# Altium PCB board.PcbDoc
Units mm, origin at the board's own origin, x right, y up, seen from the top; angles counter-clockwise.
Board outline 72 x 77 mm, 2 copper layers (Top Layer, Bottom Layer), stack 0.97 mm thick; 96 components, 88 nets, 312 pads, 182 vias.
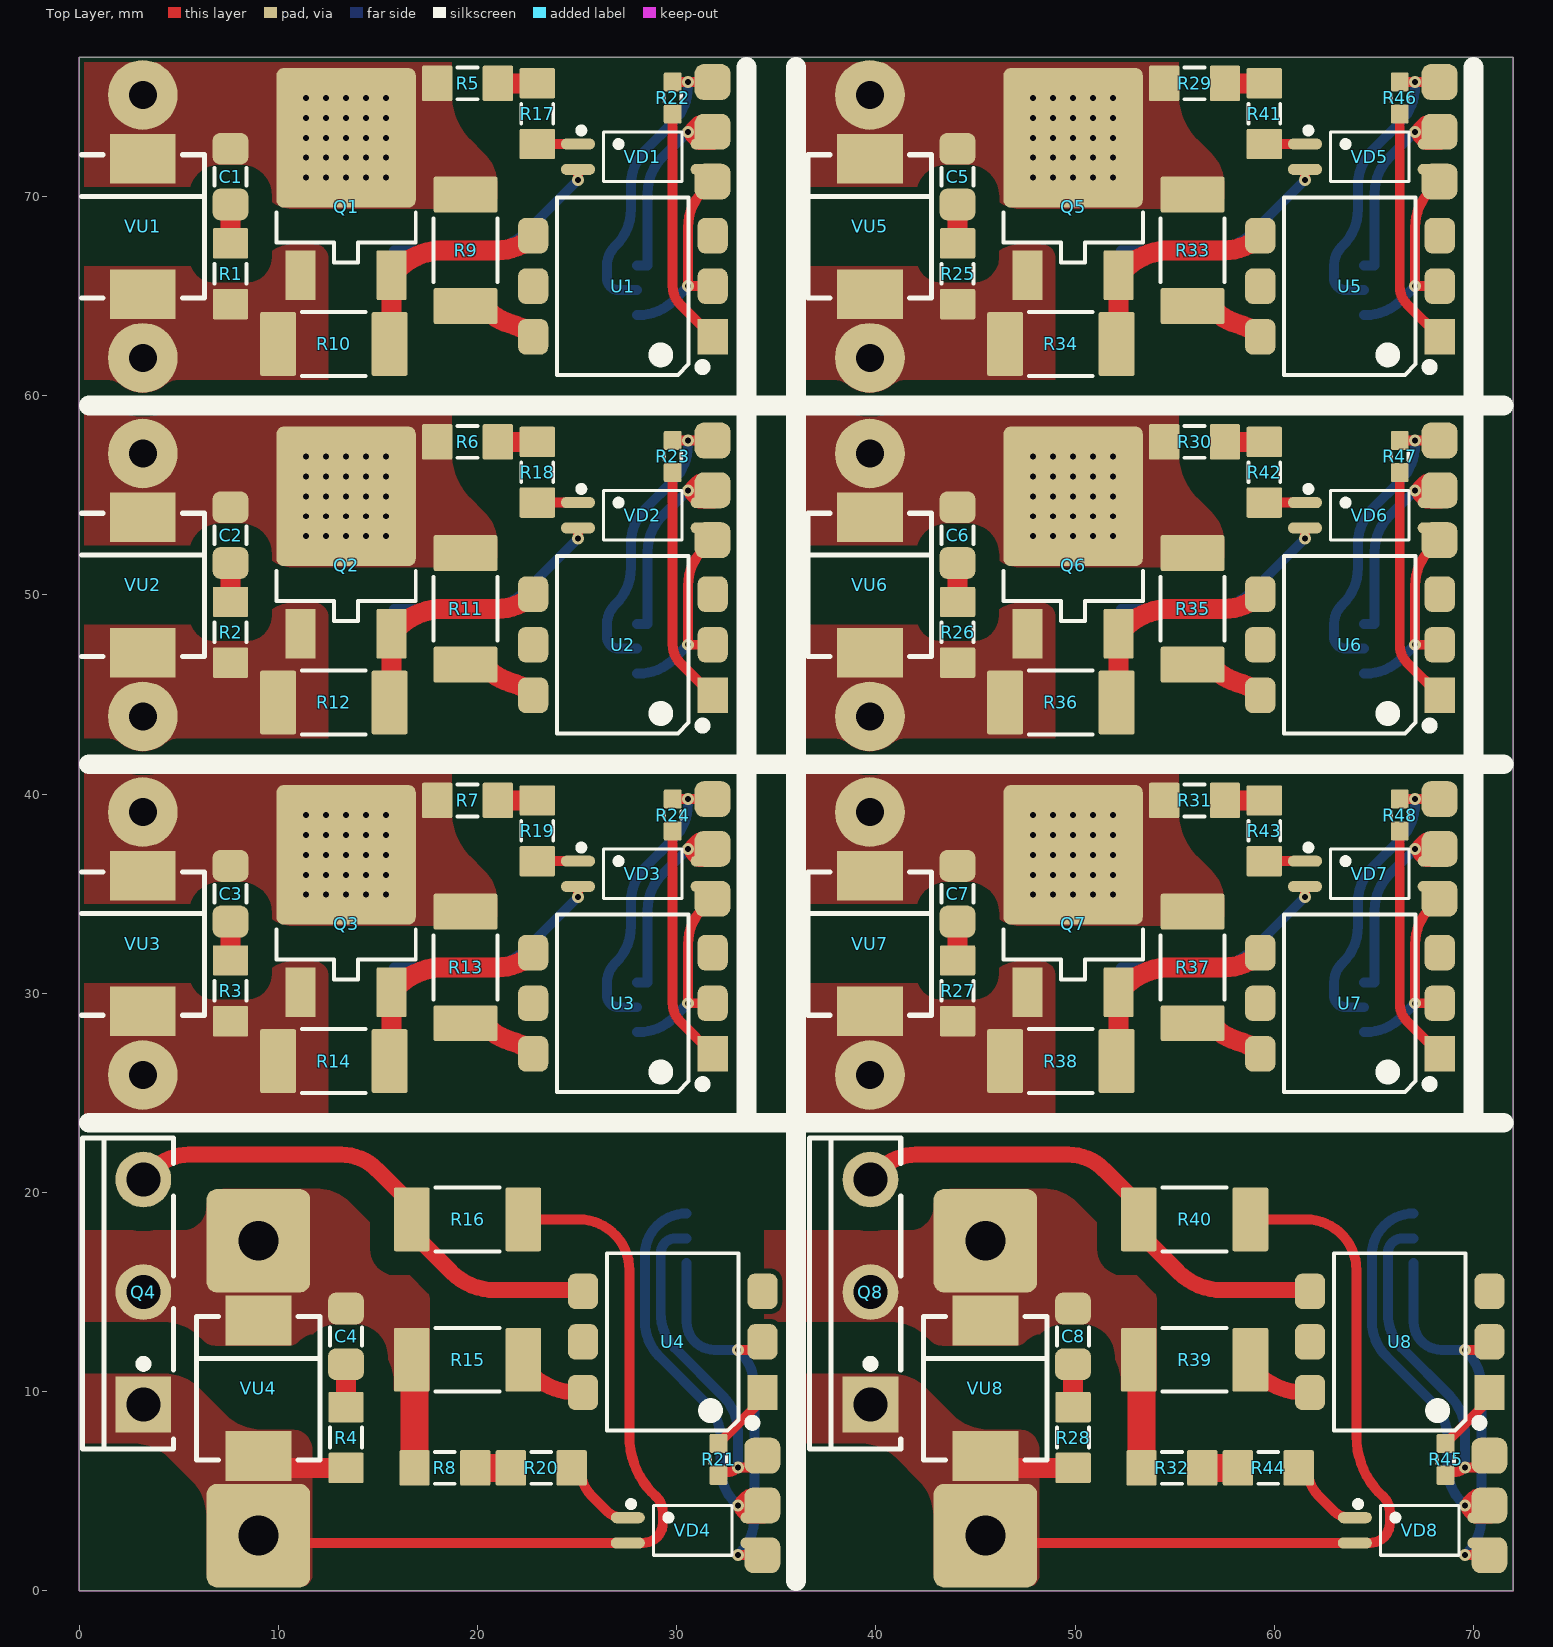
[diagram p0: Top Layer view]
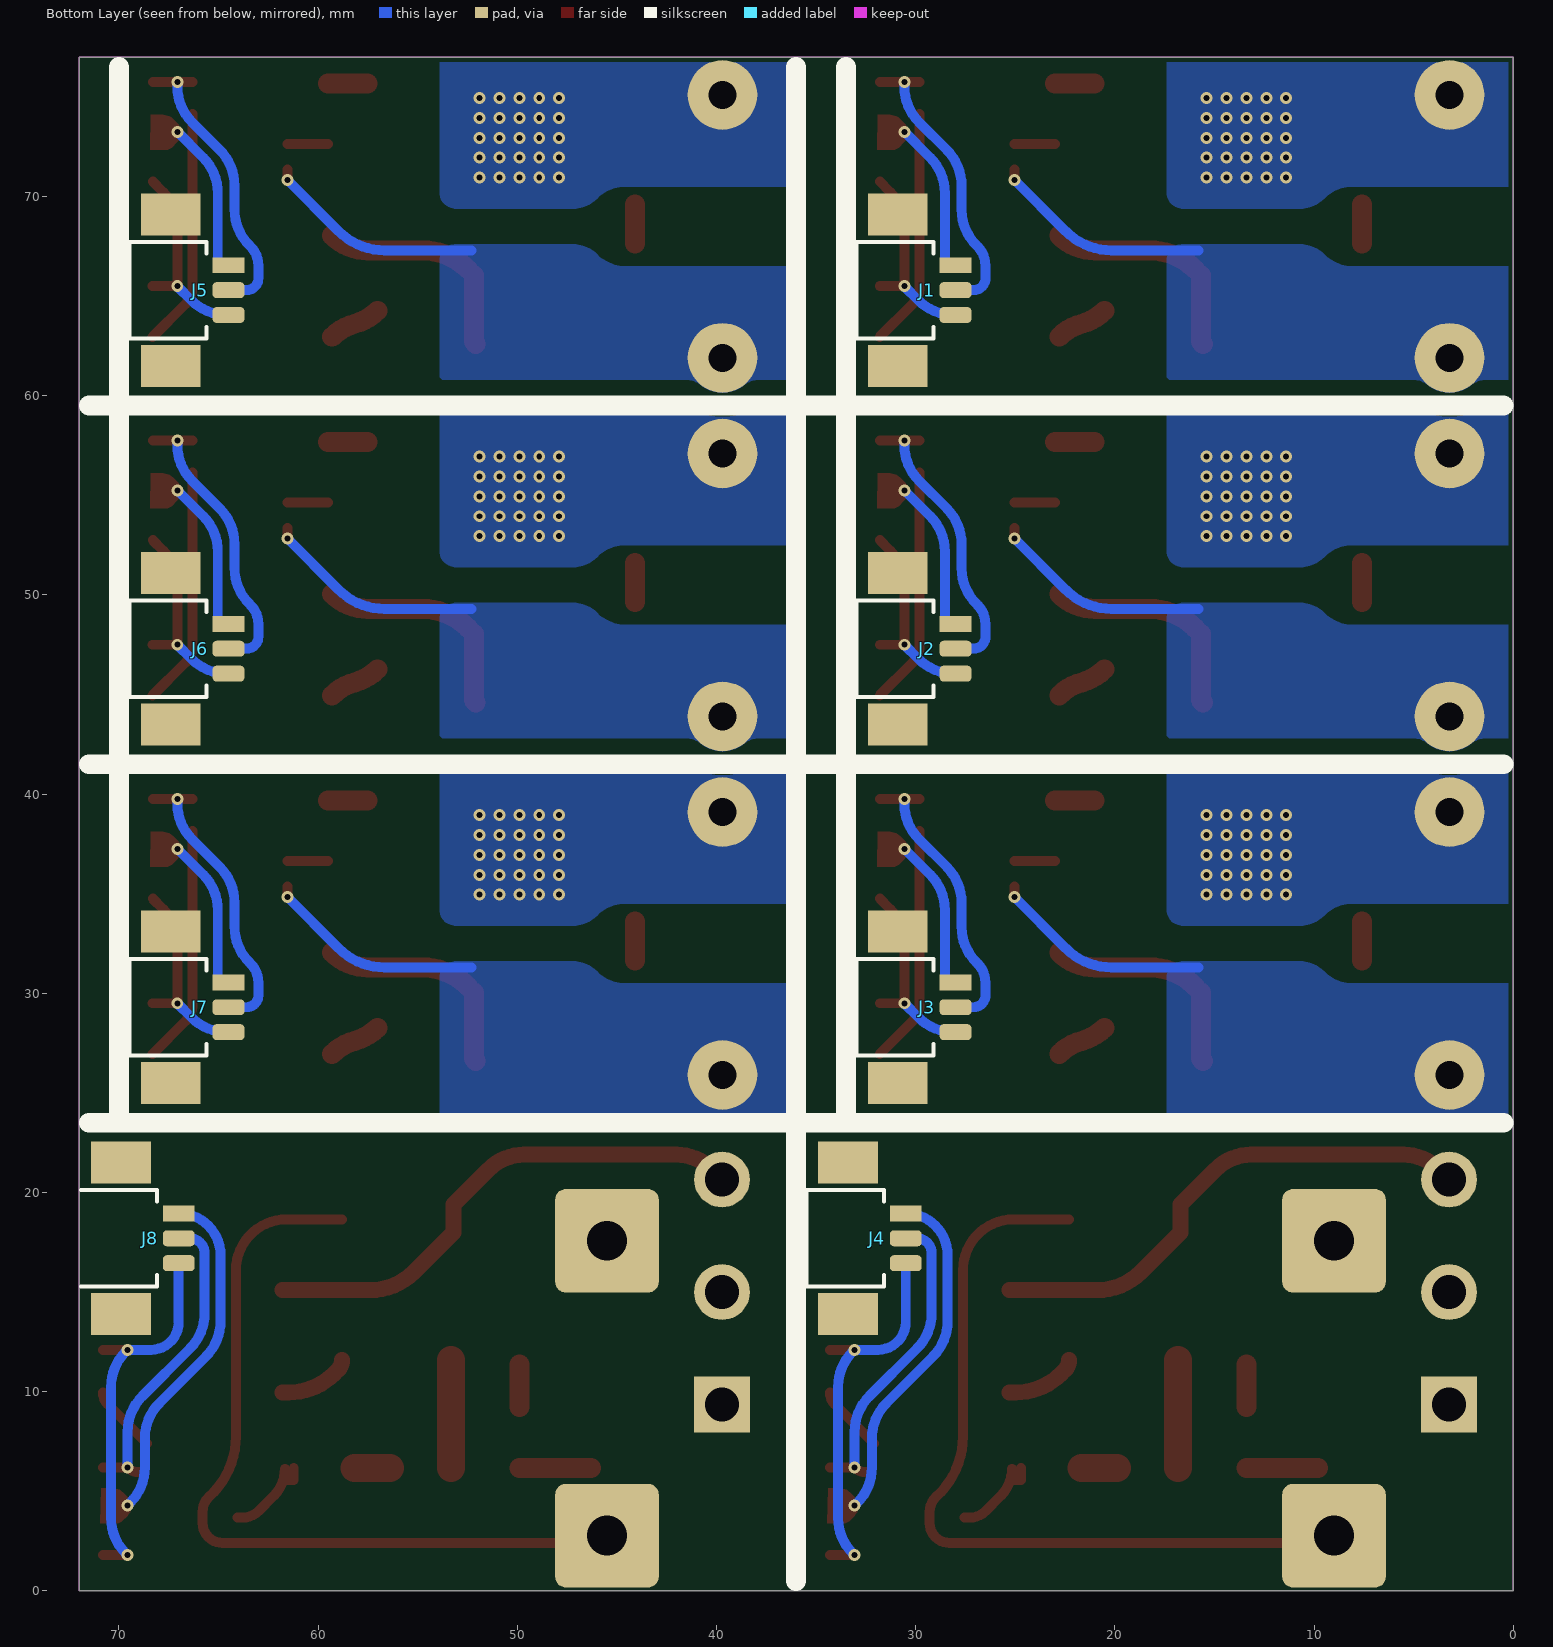
[diagram p1: Bottom Layer view, seen from below]
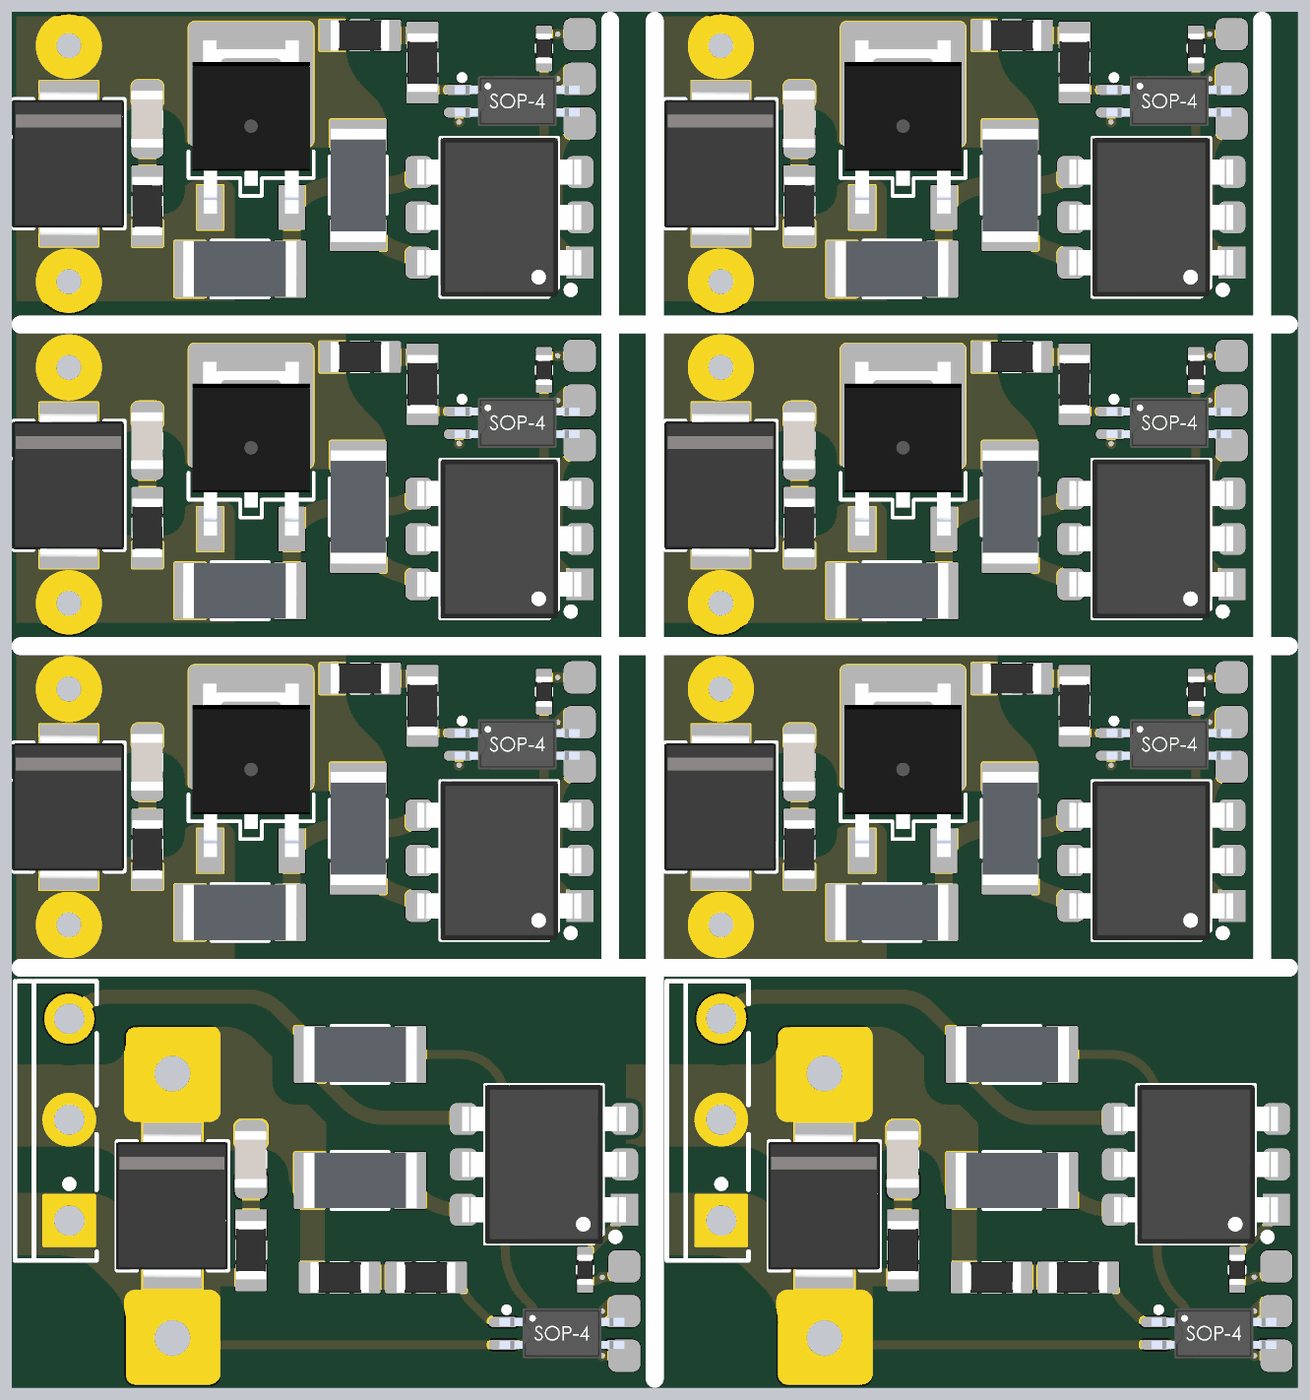
[diagram p2: 3D render of the assembled board from above, using the file's embedded part models]
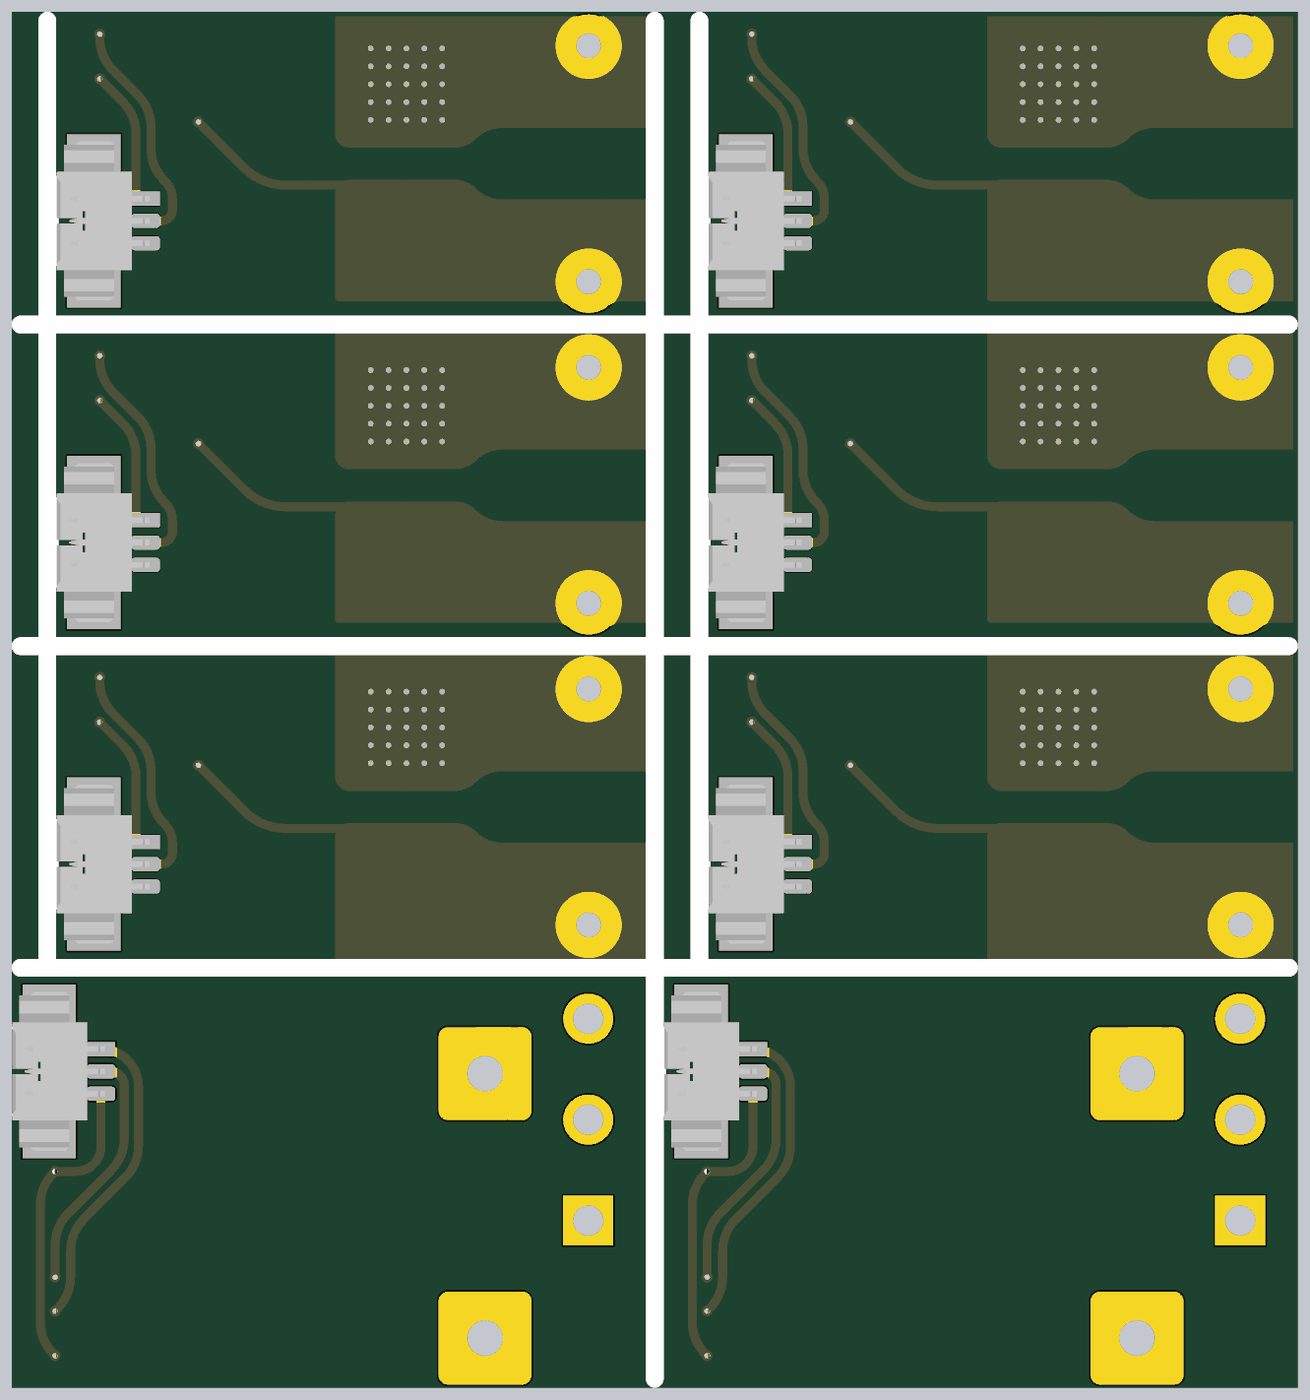
[diagram p3: 3D render of the assembled board from below, using the file's embedded part models]

## Layer stack, top to bottom
Top Solder: solder mask 0.0127, Solder Resist, Dk 3.8
Top Layer: signal copper 0.035
Dielectric: core 0.9, FR-4, Dk 4.5
Bottom Layer: signal copper 0.035
Bottom Solder: solder mask 0.0127, Solder Resist, Dk 3.8

## Board outline
0,0 0,77 72,77 72,0

## Design rules (kind name [scope] priority, off if disabled: settings)
AcuteAngle [All] p1: minimum=6.00000000000000E+0001 checktracksonly=FALSE
Clearance Clearance_1 [InNetClass('220') vs InNetClass('220')] p1: gap=1.2 ignorepadtopadclearanceinfootprint=FALSE
Clearance [All] p2: gap=0.25 ignorepadtopadclearanceinfootprint=FALSE except(0.13: Arc-Arc Arc-Track Arc-SMDPad Arc-Via Track-Track Track-SMDPad Track-Via SMDPad-SMDPad SMDPad-Via THPad-Via Via-Via; 0.15: Arc-THPad Arc-Text Arc-Hole Track-THPad Track-Text Track-Hole SMDPad-THPad SMDPad-Text SMDPad-Hole THPad-THPad THPad-Text THPad-Hole Via-Text Via-Hole Fill-Text Fill-Hole Poly-Text Poly-Hole Region-Text Region-Hole Text-Text Text-Hole)
ComponentClearance ComponentClearance_1 [HasFootprint('CONN_DG308-2.54-2P') vs HasFootprint('CONN_DG308-2.54-2P')] p1: gap=-1 collisioncheckmode=3 verticalgap=2540 showdistances=FALSE
ComponentClearance ComponentClearance_2 [HasFootprint('TP_TH_MICRO')] p2: gap=-1 collisioncheckmode=3 verticalgap=2540 showdistances=FALSE
ComponentClearance [All] p3: gap=0.3 collisioncheckmode=3 verticalgap=0.254 showdistances=FALSE
HoleSize [All] p1: absolutevalues=TRUE maxlimit=6 minlimit=0.2 maxpercent=80.000 minpercent=20.000
HoleToHoleClearance HoleToHoleClearance_1 [IsVia vs IsThruPin] p1: gap=0.7 allowstackedmicrovias=TRUE
HoleToHoleClearance [All] p2: gap=0.5 allowstackedmicrovias=TRUE
MinimumSolderMaskSliver [All] p1 off: minsoldermaskwidth=0.254
PlaneClearance [All] p1: clearance=0.45
PlaneConnect [All] p1: planeconnectstyle=Direct reliefexpansion=0.3 reliefentries=4 reliefconductorwidth=0.381 reliefairgap=0.178
PolygonConnect [All] p1: connectstyle=Direct reliefconductorwidth=0.381 reliefentries=4 polygonreliefangle="90 Angle" airgapwidth=0.356
RoutingVias [All] p1: holewidth=0.3 width=0.6 viastyle="Through Hole" minholewidth=0.2 minwidth=0.45 maxholewidth=0.9 maxwidth=1.27
SilkToSilkClearance [All] p1 off: silktosilkclearance=0.254
SilkToSolderMaskClearance [IsPad] p1 off: minsilkscreentomaskgap=0.254 clearancetoexposedcopper=TRUE
SolderMaskExpansion [All] p1: expansion=0.102 istentingtop=FALSE
UnRoutedNet [All] p1: checkbadconnections=TRUE
Width [All] p1: maxlimit=3.81 minlimit=0.14 preferedwidth=0.254
21 further rules are at their usual default settings.

## Classes and differential pairs
net class 220: NetC1_1 NetC1_2 NetC2_1 NetC2_2 NetC3_1 NetC3_2 NetC4_1 NetC4_2 NetC5_1 NetC5_2 NetC6_1 NetC6_2 NetC7_1 NetC7_2 NetC8_1 NetC8_2 NetQ1_1 NetQ1_3 NetQ2_1 NetQ2_3 NetQ3_1 NetQ3_3 NetQ4_1 NetQ4_3 NetQ5_1 NetQ5_3 NetQ6_1 NetQ6_3 NetQ7_1 NetQ7_3 NetQ8_1 NetQ8_3 NetR5_2 NetR6_2 NetR7_2 NetR8_2 NetR9_1 NetR11_1 NetR13_1 NetR15_1 NetR29_2 NetR30_2 NetR31_2 NetR32_2 NetR33_1 NetR35_1 NetR37_1 NetR39_1

## Components (designator, comment, footprint, x,y, rotation, side; value= is the part's Value field where it differs from the comment)
C1 "10nF" C1206#1 7.6,71 r90 top
C2 "10nF" C1206#1 7.6,53 r90 top
C3 "10nF" C1206#1 7.6,35 r90 top
C4 "10nF" C1206#2 13.4,12.775 r90 top
C5 "10nF" C1206#1 44.1,71 r90 top
C6 "10nF" C1206#1 44.1,53 r90 top
C7 "10nF" C1206#1 44.1,35 r90 top
C8 "10nF" C1206#2 49.9,12.775 r90 top
J1 "CTRL" CONN_MOLEX_532610371#1 30.9,65.3 r270 bottom
J2 "CTRL" CONN_MOLEX_532610371#1 30.9,47.3 r270 bottom
J3 "CTRL" CONN_MOLEX_532610371#1 30.9,29.3 r270 bottom
J4 "CTRL" CONN_MOLEX_532610371#2 33.4,17.7 r270 bottom
J5 "CTRL" CONN_MOLEX_532610371#1 67.4,65.3 r270 bottom
J6 "CTRL" CONN_MOLEX_532610371#1 67.4,47.3 r270 bottom
J7 "CTRL" CONN_MOLEX_532610371#1 67.4,29.3 r270 bottom
J8 "CTRL" CONN_MOLEX_532610371#2 69.9,17.7 r270 bottom
Q1 "T810-600B-TR" "TO-252AA (DPAK)" 13.4,69.5 r90 top
Q2 "T810-600B-TR" "TO-252AA (DPAK)" 13.4,51.5 r90 top
Q3 "T810-600B-TR" "TO-252AA (DPAK)" 13.4,33.5 r90 top
Q4 "BTA41" TO-3P_L15.5-W4.6-P5.65-T 3.225,15 r180 top
Q5 "T810-600B-TR" "TO-252AA (DPAK)" 49.9,69.5 r90 top
Q6 "T810-600B-TR" "TO-252AA (DPAK)" 49.9,51.5 r90 top
Q7 "T810-600B-TR" "TO-252AA (DPAK)" 49.9,33.5 r90 top
Q8 "BTA41" TO-3P_L15.5-W4.6-P5.65-T 39.725,15 r180 top
R1 "39" R1206 7.6,66.124 r90 top
R2 "39" R1206 7.6,48.124 r90 top
R3 "39" R1206 7.6,30.124 r90 top
R4 "39" R1206 13.4,7.699 r90 top
R5 "220k" R1206 19.5,75.683 r0 top
R6 "220k" R1206 19.5,57.683 r0 top
R7 "220k" R1206 19.5,39.683 r0 top
R8 "220k" R1206 18.362,6.175 r0 top
R9 "360" R2512 19.4,67.3 r90 top
R10 "360" R2512 12.788,62.6 r0 top
R11 "360" R2512 19.4,49.3 r90 top
R12 "360" R2512 12.788,44.6 r0 top
R13 "360" R2512 19.4,31.3 r90 top
R14 "360" R2512 12.788,26.6 r0 top
R15 "360" R2512 19.5,11.6 r180 top
R16 "360" R2512 19.5,18.65 r180 top
R17 "220k" R1206 23,74.159 r270 top
R18 "220k" R1206 23,56.159 r270 top
R19 "220k" R1206 23,38.159 r270 top
R20 "220k" R1206 23.2,6.175 r0 top
R21 "470" R0603 32.1,6.6 r270 top
R22 "470" R0603 29.8,74.95 r90 top
R23 "470" R0603 29.8,56.95 r90 top
R24 "470" R0603 29.8,38.95 r90 top
R25 "39" R1206 44.1,66.124 r90 top
R26 "39" R1206 44.1,48.124 r90 top
R27 "39" R1206 44.1,30.124 r90 top
R28 "39" R1206 49.9,7.699 r90 top
R29 "220k" R1206 56,75.683 r0 top
R30 "220k" R1206 56,57.683 r0 top
R31 "220k" R1206 56,39.683 r0 top
R32 "220k" R1206 54.862,6.175 r0 top
R33 "360" R2512 55.9,67.3 r90 top
R34 "360" R2512 49.288,62.6 r0 top
R35 "360" R2512 55.9,49.3 r90 top
R36 "360" R2512 49.288,44.6 r0 top
R37 "360" R2512 55.9,31.3 r90 top
R38 "360" R2512 49.288,26.6 r0 top
R39 "360" R2512 56,11.6 r180 top
R40 "360" R2512 56,18.65 r180 top
R41 "220k" R1206 59.5,74.159 r270 top
R42 "220k" R1206 59.5,56.159 r270 top
R43 "220k" R1206 59.5,38.159 r270 top
R44 "220k" R1206 59.7,6.175 r0 top
R45 "470" R0603 68.6,6.6 r270 top
R46 "470" R0603 66.3,74.95 r90 top
R47 "470" R0603 66.3,56.95 r90 top
R48 "470" R0603 66.3,38.95 r90 top
U1 "MOC3063SM" SMD-6#1 27.3,65.5 r90 top
U2 "MOC3063SM" SMD-6#1 27.3,47.5 r90 top
U3 "MOC3063SM" SMD-6#1 27.3,29.5 r90 top
U4 "MOC3063SM" SMD-6#2 29.8,12.5 r90 top
U5 "MOC3063SM" SMD-6#1 63.8,65.5 r90 top
U6 "MOC3063SM" SMD-6#1 63.8,47.5 r90 top
U7 "MOC3063SM" SMD-6#1 63.8,29.5 r90 top
U8 "MOC3063SM" SMD-6#2 66.3,12.5 r90 top
VD1 "EL3H4(A)(TA)-VG" SOP-4_L4.4-W2.8-P1.27-LS7.0-TL#1 28.3,72 r0 top
VD2 "EL3H4(A)(TA)-VG" SOP-4_L4.4-W2.8-P1.27-LS7.0-TL#1 28.3,54 r0 top
VD3 "EL3H4(A)(TA)-VG" SOP-4_L4.4-W2.8-P1.27-LS7.0-TL#1 28.3,36 r0 top
VD4 "EL3H4(A)(TA)-VG" SOP-4_L4.4-W2.8-P1.27-LS7.0-TL#2 30.8,3.04 r0 top
VD5 "EL3H4(A)(TA)-VG" SOP-4_L4.4-W2.8-P1.27-LS7.0-TL#1 64.8,72 r0 top
VD6 "EL3H4(A)(TA)-VG" SOP-4_L4.4-W2.8-P1.27-LS7.0-TL#1 64.8,54 r0 top
VD7 "EL3H4(A)(TA)-VG" SOP-4_L4.4-W2.8-P1.27-LS7.0-TL#1 64.8,36 r0 top
VD8 "EL3H4(A)(TA)-VG" SOP-4_L4.4-W2.8-P1.27-LS7.0-TL#2 67.3,3.04 r0 top
VU1 "220V" SMC#1 3.2,68.5 r270 top
VU2 "220V" SMC#1 3.2,50.5 r270 top
VU3 "220V" SMC#1 3.2,32.5 r270 top
VU4 "220V" SMC#2 9,10.175 r270 top
VU5 "220V" SMC#1 39.7,68.5 r270 top
VU6 "220V" SMC#1 39.7,50.5 r270 top
VU7 "220V" SMC#1 39.7,32.5 r270 top
VU8 "220V" SMC#2 45.5,10.175 r270 top

## Footprints (in the part's own frame and the unit in brackets; to place one, negate y for a bottom-side part, rotate by r counter-clockwise, add the part's x,y. Pads: shape width x height; smd on the part's side, far side on the other; paste and mask are expansions set on the pad)
C1206#1 [mm] "Chip Capacitor"
  rrect50% 1.6x1.8 smd mask+0.05: 1(-1.4,0) 2(1.4,0)
  silkscreen extent -0.45,-0.8 0.45,0.8, body extent -1.6,-0.88 1.6,0.92, height 1.6
C1206#2 [mm] "Chip Capacitor"
  rrect50% 1.6x1.8 smd: 1(-1.4,0) 2(1.4,0)
  silkscreen extent -0.45,-0.8 0.45,0.8, body extent -1.6,-0.88 1.6,0.92, height 1.6
CONN_MOLEX_532610371#1 [mm] "R/A"
  rect 0.8x1.6 smd mask+0.05: 1(-1.25,2.9)
  rrect50% 0.8x1.6 smd mask+0.05: 2(0,2.9) 3(1.25,2.9)
  rect 2.1x3 smd: 4(-3.8,0) 4(3.8,0)
  silkscreen extent -2.43,-2.08 2.42,1.8, body extent -4.45,-2.07 4.45,3.13, height 3.4
CONN_MOLEX_532610371#2 [mm] "R/A"
  rect 0.8x1.6 smd: 1(-1.25,2.9)
  rrect50% 0.8x1.6 smd: 2(0,2.9) 3(1.25,2.9)
  rect 2.1x3 smd: 4(-3.8,0) 4(3.8,0)
  silkscreen extent -2.43,-2.08 2.42,1.8, body extent -4.45,-2.07 4.45,3.13, height 3.4
R0603 [mil] "Chip Resistor; Body 1.6 x 0.8 mm (LxW typ)"
  rrect20% 38x35.43 smd mask+1.97: 1(-31.5,0) 2(31.5,0)
  silkscreen extent -7,-17 7,17, body extent -33,-18 33,18, height 22
R1206 [mil] "Chip Resistor"
  rrect10% 60x70 smd mask+1.97: 1(-60,0) 2(60,0)
  silkscreen extent -20,-31 20,31, body extent -65,-33 65,33, height 26
R2512 [mm] "Chip Resistor; Body 6.4 x 3.2 mm (LxW typ)"
  rrect10% 1.8x3.2 smd mask+0.05: 1(-2.8,0) 2(2.8,0)
  silkscreen extent -1.6,-1.6 1.6,1.6, body extent -3.19,-1.55 3.16,1.55, height 0.55
SMC#1 [mm]
  rect 2.5x3.3 smd mask+0.05: 1(3.4,0) 2(-3.4,0)
  silkscreen extent -3.6,-3.07 3.6,3.1, body extent -4.08,-3.15 4.08,3.1, height 2.65
SMC#2 [mm]
  rect 2.5x3.3 smd: 1(3.4,0) 2(-3.4,0)
  silkscreen extent -3.6,-3.1 3.6,3.1, body extent -4.08,-3.15 4.08,3.1, height 2.65
SMD-6#1 [mm]
  rect 1.78x1.52 smd mask+0.025: 1(-2.54,-4.505)
  rrect50% 1.78x1.52 smd mask+0.025: 2(0,-4.505) 3(2.54,-4.505)
  rrect50% 1.78x1.52 smd mask+0.05: 4(2.54,4.505) 5(0,4.505) 6(-2.54,4.505)
  silkscreen extent -4.45,-4.1 4.45,3.3, body extent -4.45,-4.58 4.45,4.58, height 5.08
SMD-6#2 [mm]
  rect 1.78x1.52 smd mask+0.025: 1(-2.54,-4.505)
  rrect50% 1.78x1.52 smd mask+0.025: 2(0,-4.505) 3(2.54,-4.505) 4(2.54,4.505) 5(0,4.505) 6(-2.54,4.505)
  silkscreen extent -4.45,-4.1 4.45,3.3, body extent -4.45,-4.58 4.45,4.58, height 5.08
SOP-4_L4.4-W2.8-P1.27-LS7.0-TL#1 [mm]
  oval 1.71x0.56 smd mask+0.05: 1(-3.255,0.635) 2(-3.255,-0.635) 3(3.255,-0.635) 4(3.255,0.635)
  silkscreen extent -3.24,-1.25 1.97,1.47, body extent -3.5,-1.4 3.5,1.4, height 2.1
SOP-4_L4.4-W2.8-P1.27-LS7.0-TL#2 [mm]
  oval 1.71x0.56 smd: 1(-3.255,0.635) 2(-3.255,-0.635) 3(3.255,-0.635) 4(3.255,0.635)
  silkscreen extent -3.24,-1.25 1.97,1.47, body extent -3.5,-1.4 3.5,1.4, height 2.1
TO-3P_L15.5-W4.6-P5.65-T [mm]
  rect 2.8x2.8 hole 1.7: 1(0,5.65)
  round 2.8 hole 1.7: 2(0,0) 3(0,-5.65)
  silkscreen extent -1.52,-7.75 3.05,7.87
"TO-252AA (DPAK)" [mm] "D-PAK"
  rect 2.5x1.5 smd mask+0.05: 1(-3.45,2.286)
  rrect10% 7x7 smd mask+0.05: 2(3.45,0)
  rrect10% 2.5x1.5 smd mask+0.05: 3(-3.45,-2.286)
  silkscreen extent -2.8,-3.5 -0.3,3.5, body extent -3.8,-3.29 5.9,3.29, height 2.3

## Part data
C1 C2 C3 C4 C5 C6 C7 C8: library part CAP, "10nF 1kV 1206"
J1 J2 J3 J4 J5 J6 J7 J8: library part "Header 3", "532610371"
Q1 Q2 Q3 Q5 Q6 Q7: library part BTA16F
R1 R2 R3 R4 R25 R26 R27 R28: library part RES, "39R 1206"
R5 R6 R7 R8 R17 R18 R19 R20 R29 R30 R31 R32 R41 R42 R43 R44: library part RES, "220k 1206"
R9 R10 R11 R12 R13 R14 R15 R16 R33 R34 R35 R36 R37 R38 R39 R40: library part RES, "360R 2512"
R21 R22 R23 R24 R45 R46 R47 R48: library part RES, "470R 0603"
U1 U2 U3 U4 U5 U6 U7 U8: "MOC3063S-TA1"
VU1 VU2 VU3 VU4 VU5 VU6 VU7 VU8: library part RES, "3225D471KJ"

## Free pads (board coordinates)
  round 3.5 hole 1.4: 1(3.2,25.9) 1(3.2,43.9) 1(3.2,61.9) 1(39.7,25.9) 1(39.7,43.9) 1(39.7,61.9) 2(3.2,39.1) 2(3.2,57.1) 2(3.2,75.1) 2(39.7,39.1) 2(39.7,57.1) 2(39.7,75.1)
  rrect20% 5.2x5.2 hole 2: 1(9,2.775) 1(45.5,2.775) 2(9,17.575) 2(45.5,17.575)
  rrect50% 1.8x1.8 smd mask+0.05: *(31.8,34.75) *(31.8,52.75) *(31.8,70.75) *(34.3,4.29) *(68.3,34.75) *(68.3,52.75) *(68.3,70.75) *(70.8,4.29) *1(31.8,37.25) *1(31.8,55.25) *1(31.8,73.25) *1(34.3,1.79) *1(68.3,37.25) *1(68.3,55.25) *1(68.3,73.25) *1(70.8,1.79) *2(31.8,39.75) *2(31.8,57.75) *2(31.8,75.75) *2(34.3,6.79) *2(68.3,39.75) *2(68.3,57.75) *2(68.3,75.75) *2(70.8,6.79)

## Via types
v1: diameter 0.6, hole 0.3, Top Layer to Bottom Layer, tented both sides, 182 vias

## Nets (pads, with @x,y where several pads share a name; then routed paths per layer and width w, separated by ;. In a path a pad name is that pad's centre, name@x,y a point inside that pad or via, vN(x,y) a via of type N, cw(c..) or ccw(c..) an arc to the next point about the centre after c; other vN are vias at no path point)
NetC1_1: C1.1 R1.2 | length 2
  Top Layer w1: R1.2 C1.1
NetC1_2: C1.2 pad.2@3.2,75.1 Q1.2 R5.1 R9.2 VU1.2
  other v1: 11.4,70.95 12.4,70.95 13.4,70.95 14.4,70.95 15.4,70.95 11.4,71.95 12.4,71.95 13.4,71.95 14.4,71.95 15.4,71.95 11.4,72.95 12.4,72.95 13.4,72.95 14.4,72.95 15.4,72.95 11.4,73.95 12.4,73.95 13.4,73.95 14.4,73.95 15.4,73.95 11.4,74.95 12.4,74.95 13.4,74.95 14.4,74.95 15.4,74.95
NetC2_1: C2.1 R2.2 | length 2
  Top Layer w1: R2.2 C2.1
NetC2_2: C2.2 pad.2@3.2,57.1 Q2.2 R6.1 R11.2 VU2.2
  other v1: 11.4,52.95 12.4,52.95 13.4,52.95 14.4,52.95 15.4,52.95 11.4,53.95 12.4,53.95 13.4,53.95 14.4,53.95 15.4,53.95 11.4,54.95 12.4,54.95 13.4,54.95 14.4,54.95 15.4,54.95 11.4,55.95 12.4,55.95 13.4,55.95 14.4,55.95 15.4,55.95 11.4,56.95 12.4,56.95 13.4,56.95 14.4,56.95 15.4,56.95
NetC3_1: C3.1 R3.2 | length 2
  Top Layer w1: R3.2 C3.1
NetC3_2: C3.2 pad.2@3.2,39.1 Q3.2 R7.1 R13.2 VU3.2
  other v1: 11.4,34.95 12.4,34.95 13.4,34.95 14.4,34.95 15.4,34.95 11.4,35.95 12.4,35.95 13.4,35.95 14.4,35.95 15.4,35.95 11.4,36.95 12.4,36.95 13.4,36.95 14.4,36.95 15.4,36.95 11.4,37.95 12.4,37.95 13.4,37.95 14.4,37.95 15.4,37.95 11.4,38.95 12.4,38.95 13.4,38.95 14.4,38.95 15.4,38.95
NetC4_1: C4.1 R4.2 | length 2.2
  Top Layer w1: R4.2 C4.1
NetC4_2: C4.2 pad.2@9,17.575 Q4.2 R8.1 R15.2 VU4.2 | length 5.4
  Top Layer w1.4: R8.1 R15.2@16.838,11.6
NetC5_1: C5.1 R25.2 | length 2
  Top Layer w1: R25.2 C5.1
NetC5_2: C5.2 pad.2@39.7,75.1 Q5.2 R29.1 R33.2 VU5.2
  other v1: 47.9,70.95 48.9,70.95 49.9,70.95 50.9,70.95 51.9,70.95 47.9,71.95 48.9,71.95 49.9,71.95 50.9,71.95 51.9,71.95 47.9,72.95 48.9,72.95 49.9,72.95 50.9,72.95 51.9,72.95 47.9,73.95 48.9,73.95 49.9,73.95 50.9,73.95 51.9,73.95 47.9,74.95 48.9,74.95 49.9,74.95 50.9,74.95 51.9,74.95
NetC6_1: C6.1 R26.2 | length 2
  Top Layer w1: R26.2 C6.1
NetC6_2: C6.2 pad.2@39.7,57.1 Q6.2 R30.1 R35.2 VU6.2
  other v1: 47.9,52.95 48.9,52.95 49.9,52.95 50.9,52.95 51.9,52.95 47.9,53.95 48.9,53.95 49.9,53.95 50.9,53.95 51.9,53.95 47.9,54.95 48.9,54.95 49.9,54.95 50.9,54.95 51.9,54.95 47.9,55.95 48.9,55.95 49.9,55.95 50.9,55.95 51.9,55.95 47.9,56.95 48.9,56.95 49.9,56.95 50.9,56.95 51.9,56.95
NetC7_1: C7.1 R27.2 | length 2
  Top Layer w1: R27.2 C7.1
NetC7_2: C7.2 pad.2@39.7,39.1 Q7.2 R31.1 R37.2 VU7.2
  other v1: 47.9,34.95 48.9,34.95 49.9,34.95 50.9,34.95 51.9,34.95 47.9,35.95 48.9,35.95 49.9,35.95 50.9,35.95 51.9,35.95 47.9,36.95 48.9,36.95 49.9,36.95 50.9,36.95 51.9,36.95 47.9,37.95 48.9,37.95 49.9,37.95 50.9,37.95 51.9,37.95 47.9,38.95 48.9,38.95 49.9,38.95 50.9,38.95 51.9,38.95
NetC8_1: C8.1 R28.2 | length 2.2
  Top Layer w1: R28.2 C8.1
NetC8_2: C8.2 pad.2@45.5,17.575 Q8.2 R32.1 R39.2 VU8.2 | length 5.4
  Top Layer w1.4: R32.1 R39.2@53.338,11.6
NetJ1_1: J1.1 pad.*1@31.8,73.25 VD1.4 | length 8
  Bottom Layer w0.5: J1.1 28.54,66.55 28.54,70.181 cw(c31.054,70.181) 29.276,71.959 v1(30.568,73.25)
NetJ1_2: J1.2 pad.*2@31.8,75.75 R22.2 | length 15
  Top Layer w0.5: R22.2 v1(30.568,75.75) pad.*2@31.8,75.75
  Bottom Layer w0.5: J1.2 27.1,65.3 cw(c27.1,65.9) 26.5,65.9 26.5,66.534 cw(c27.866,66.534) 26.9,67.5 26.963,67.563 ccw(c25.185,69.342) 27.7,69.342 27.7,70.558 cw(c30.215,70.558) 28.437,72.337 29.831,73.731 ccw(c28.053,75.509) 30.568,75.509 v1(30.568,75.75)
NetJ1_3: J1.3 pad.*@31.8,70.75 U1.2 VD1.3 | length 9.9
  Top Layer w0.5: pad.*@31.8,70.75 31.309,70.259 ccw(c33.087,68.481) 30.573,68.481 v1(30.573,65.5) U1.2
  Bottom Layer w0.5: J1.3 28.081,64.05 ccw(c28.081,66.565) 29.859,64.787 v1(30.573,65.5)
NetJ2_1: J2.1 pad.*1@31.8,55.25 VD2.4 | length 8
  Bottom Layer w0.5: J2.1 28.54,48.55 28.54,52.181 cw(c31.054,52.181) 29.276,53.959 v1(30.568,55.25)
NetJ2_2: J2.2 pad.*2@31.8,57.75 R23.2 | length 15
  Top Layer w0.5: R23.2 v1(30.568,57.75) pad.*2@31.8,57.75
  Bottom Layer w0.5: J2.2 27.1,47.3 cw(c27.1,47.9) 26.5,47.9 26.5,48.534 cw(c27.866,48.534) 26.9,49.5 26.963,49.563 ccw(c25.185,51.342) 27.7,51.342 27.7,52.558 cw(c30.215,52.558) 28.437,54.337 29.831,55.731 ccw(c28.053,57.509) 30.568,57.509 v1(30.568,57.75)
NetJ2_3: J2.3 pad.*@31.8,52.75 U2.2 VD2.3 | length 9.9
  Top Layer w0.5: pad.*@31.8,52.75 31.309,52.259 ccw(c33.087,50.481) 30.573,50.481 v1(30.573,47.5) U2.2
  Bottom Layer w0.5: J2.3 28.081,46.05 ccw(c28.081,48.565) 29.859,46.787 v1(30.573,47.5)
NetJ3_1: J3.1 pad.*1@31.8,37.25 VD3.4 | length 8
  Bottom Layer w0.5: J3.1 28.54,30.55 28.54,34.181 cw(c31.054,34.181) 29.276,35.959 v1(30.568,37.25)
NetJ3_2: J3.2 pad.*2@31.8,39.75 R24.2 | length 15
  Top Layer w0.5: R24.2 v1(30.568,39.75) pad.*2@31.8,39.75
  Bottom Layer w0.5: J3.2 27.1,29.3 cw(c27.1,29.9) 26.5,29.9 26.5,30.534 cw(c27.866,30.534) 26.9,31.5 26.963,31.563 ccw(c25.185,33.342) 27.7,33.342 27.7,34.558 cw(c30.215,34.558) 28.437,36.337 29.831,37.731 ccw(c28.053,39.509) 30.568,39.509 v1(30.568,39.75)
NetJ3_3: J3.3 pad.*@31.8,34.75 U3.2 VD3.3 | length 9.9
  Top Layer w0.5: pad.*@31.8,34.75 31.309,34.259 ccw(c33.087,32.481) 30.573,32.481 v1(30.573,29.5) U3.2
  Bottom Layer w0.5: J3.3 28.081,28.05 ccw(c28.081,30.565) 29.859,28.787 v1(30.573,29.5)
NetJ4_1: J4.1 pad.*@34.3,4.29 VD4.4 | length 17.5
  Bottom Layer w0.5: J4.1 ccw(c30.5,16.85) 28.4,16.85 28.4,13.542 ccw(c30.915,13.542) 29.137,11.763 31.463,9.437 cw(c29.685,7.658) 32.2,7.658 32.2,6.199 ccw(c34.715,6.199) 32.937,4.421 v1(33.068,4.29)
NetJ4_2: J4.2 pad.*2@34.3,6.79 R21.2 | length 15.7
  Top Layer w0.5: R21.2@32.515,5.961 ccw(c32.515,6.742) v1(33.068,6.19) pad.*2@34.3,6.19
  Bottom Layer w0.5: J4.2 29.95,17.7 ccw(c29.95,16.95) 29.2,16.95 29.2,13.942 ccw(c31.715,13.942) 29.937,12.163 32.331,9.769 cw(c30.553,7.991) 33.068,7.991 v1(33.068,6.19)
NetJ4_3: J4.3 pad.*1@34.3,1.79 U4.2 VD4.3 | length 19.6
  Top Layer w0.5: v1(33.068,1.79) pad.*1@34.3,1.79 ; v1(33.073,12.1) U4.2@34.305,12.1
  Bottom Layer w0.5: J4.3 30.5,13.5 ccw(c31.9,13.5) 31.9,12.1 v1(33.073,12.1) 33.163,12.009 cw(c31.385,10.231) 33.9,10.231 33.9,3.664 cw(c31.385,3.664) 33.163,1.886 v1(33.068,1.79)
NetJ5_1: J5.1 pad.*1@68.3,73.25 VD5.4 | length 8
  Bottom Layer w0.5: J5.1 65.04,66.55 65.04,70.181 cw(c67.554,70.181) 65.776,71.959 v1(67.068,73.25)
NetJ5_2: J5.2 pad.*2@68.3,75.75 R46.2 | length 15
  Top Layer w0.5: R46.2 v1(67.068,75.75) pad.*2@68.3,75.75
  Bottom Layer w0.5: J5.2 63.6,65.3 cw(c63.6,65.9) 63,65.9 63,66.534 cw(c64.366,66.534) 63.4,67.5 63.464,67.563 ccw(c61.685,69.342) 64.2,69.342 64.2,70.558 cw(c66.715,70.558) 64.937,72.337 66.331,73.731 ccw(c64.553,75.509) 67.068,75.509 v1(67.068,75.75)
NetJ5_3: J5.3 pad.*@68.3,70.75 U5.2 VD5.3 | length 9.9
  Top Layer w0.5: pad.*@68.3,70.75 67.809,70.259 ccw(c69.587,68.481) 67.073,68.481 v1(67.073,65.5) U5.2
  Bottom Layer w0.5: J5.3 64.581,64.05 ccw(c64.581,66.565) 66.359,64.787 v1(67.073,65.5)
NetJ6_1: J6.1 pad.*1@68.3,55.25 VD6.4 | length 8
  Bottom Layer w0.5: J6.1 65.04,48.55 65.04,52.181 cw(c67.554,52.181) 65.776,53.959 v1(67.068,55.25)
NetJ6_2: J6.2 pad.*2@68.3,57.75 R47.2 | length 15
  Top Layer w0.5: R47.2 v1(67.068,57.75) pad.*2@68.3,57.75
  Bottom Layer w0.5: J6.2 63.6,47.3 cw(c63.6,47.9) 63,47.9 63,48.534 cw(c64.366,48.534) 63.4,49.5 63.463,49.563 ccw(c61.685,51.342) 64.2,51.342 64.2,52.558 cw(c66.715,52.558) 64.937,54.337 66.331,55.731 ccw(c64.553,57.509) 67.068,57.509 v1(67.068,57.75)
NetJ6_3: J6.3 pad.*@68.3,52.75 U6.2 VD6.3 | length 9.9
  Top Layer w0.5: pad.*@68.3,52.75 67.809,52.259 ccw(c69.587,50.481) 67.073,50.481 v1(67.073,47.5) U6.2
  Bottom Layer w0.5: J6.3 64.581,46.05 ccw(c64.581,48.565) 66.359,46.787 v1(67.073,47.5)
NetJ7_1: J7.1 pad.*1@68.3,37.25 VD7.4 | length 8
  Bottom Layer w0.5: J7.1 65.04,30.55 65.04,34.181 cw(c67.554,34.181) 65.776,35.959 v1(67.068,37.25)
NetJ7_2: J7.2 pad.*2@68.3,39.75 R48.2 | length 15
  Top Layer w0.5: R48.2 v1(67.068,39.75) pad.*2@68.3,39.75
  Bottom Layer w0.5: J7.2 63.6,29.3 cw(c63.6,29.9) 63,29.9 63,30.534 cw(c64.366,30.534) 63.4,31.5 63.463,31.563 ccw(c61.685,33.342) 64.2,33.342 64.2,34.558 cw(c66.715,34.558) 64.937,36.337 66.331,37.731 ccw(c64.553,39.509) 67.068,39.509 v1(67.068,39.75)
NetJ7_3: J7.3 pad.*@68.3,34.75 U7.2 VD7.3 | length 9.9
  Top Layer w0.5: pad.*@68.3,34.75 67.809,34.259 ccw(c69.587,32.481) 67.073,32.481 v1(67.073,29.5) U7.2
  Bottom Layer w0.5: J7.3 64.581,28.05 ccw(c64.581,30.565) 66.359,28.787 v1(67.073,29.5)
NetJ8_1: J8.1 pad.*@70.8,4.29 VD8.4 | length 17.5
  Bottom Layer w0.5: J8.1 ccw(c67,16.85) 64.9,16.85 64.9,13.542 ccw(c67.415,13.542) 65.637,11.763 67.963,9.437 cw(c66.185,7.658) 68.7,7.658 68.7,6.199 ccw(c71.215,6.199) 69.437,4.421 v1(69.568,4.29)
NetJ8_2: J8.2 pad.*2@70.8,6.79 R45.2 | length 15.7
  Top Layer w0.5: R45.2@69.015,5.961 ccw(c69.015,6.742) v1(69.568,6.19) pad.*2@70.8,6.19
  Bottom Layer w0.5: J8.2 66.45,17.7 ccw(c66.45,16.95) 65.7,16.95 65.7,13.942 ccw(c68.215,13.942) 66.437,12.163 68.831,9.769 cw(c67.053,7.991) 69.568,7.991 v1(69.568,6.19)
NetJ8_3: J8.3 pad.*1@70.8,1.79 U8.2 VD8.3 | length 19.6
  Top Layer w0.5: v1(69.568,1.79) pad.*1@70.8,1.79 ; v1(69.573,12.1) U8.2@70.805,12.1
  Bottom Layer w0.5: J8.3 67,13.5 ccw(c68.4,13.5) 68.4,12.1 v1(69.573,12.1) 69.663,12.009 cw(c67.885,10.231) 70.4,10.231 70.4,3.664 cw(c67.885,3.664) 69.663,1.886 v1(69.568,1.79)
NetQ1_1: pad.1@3.2,61.9 Q1.1 R1.1 R10.1 VD1.2 VU1.1 | length 11.1
  Top Layer w0.5: v1(25.045,70.833) VD1.2
  Bottom Layer w0.5: 15.8,67.3 20.166,67.3 ccw(c20.166,70.551) 22.465,68.252 v1(25.045,70.833)
NetQ1_3: Q1.3 R10.2 U1.4 | length 10.7
  Top Layer w1: R10.2 ccw(c15.35,62.838) 15.686,62.838 Q1.3 ; Q1.3@15.985,66.349 cw(c18.283,64.049) 18.283,67.3 21.008,67.3 ccw(c21.008,69.827) U1.4
NetQ2_1: pad.1@3.2,43.9 Q2.1 R2.1 R12.1 VD2.2 VU2.1 | length 11.1
  Top Layer w0.5: v1(25.045,52.833) VD2.2
  Bottom Layer w0.5: 15.8,49.3 20.166,49.3 ccw(c20.166,52.551) 22.465,50.252 v1(25.045,52.833)
NetQ2_3: Q2.3 R12.2 U2.4 | length 10.7
  Top Layer w1: R12.2 ccw(c15.35,44.838) 15.686,44.838 Q2.3 ; Q2.3@15.985,48.349 cw(c18.283,46.049) 18.283,49.3 21.008,49.3 ccw(c21.008,51.827) U2.4
NetQ3_1: pad.1@3.2,25.9 Q3.1 R3.1 R14.1 VD3.2 VU3.1 | length 11.1
  Top Layer w0.5: v1(25.045,34.833) VD3.2
  Bottom Layer w0.5: 15.8,31.3 20.166,31.3 ccw(c20.166,34.551) 22.465,32.252 v1(25.045,34.833)
NetQ3_3: Q3.3 R14.2 U3.4 | length 10.7
  Top Layer w1: R14.2 ccw(c15.35,26.838) 15.686,26.838 Q3.3 ; Q3.3@15.985,30.349 cw(c18.283,28.049) 18.283,31.3 21.008,31.3 ccw(c21.008,33.827) U3.4
NetQ4_1: pad.1@9,2.775 Q4.1 R4.1 R16.1 VD4.2 VU4.1 | length 44.6
  Top Layer w0.5: pad.1@8.839,2.405 VD4.2 28.305,2.405 ccw(c28.305,3.4) 29.3,3.4 29.3,3.976 ccw(c28.276,3.976) 29,4.7 cw(c31.721,7.759) 27.627,7.759 27.627,16.102 ccw(c25.079,16.102) 25.079,18.65 R16.1
  Top Layer w1: VU4.1@9.8,6.175 R4.1
NetQ4_3: Q4.3 R16.2 U4.4 | length 25.9
  Top Layer w0.8: Q4.3 3.738,21.163 cw(c5.517,19.385) 5.517,21.9 13.158,21.9 cw(c13.158,19.385) 14.937,21.163 16.7,19.4 R16.2 16.7,18 18.681,16.019 ccw(c20.9,18.238) 20.9,15.1 U4.4@25.295,15.1
NetQ5_1: pad.1@39.7,61.9 Q5.1 R25.1 R34.1 VD5.2 VU5.1 | length 11.1
  Top Layer w0.5: v1(61.545,70.833) VD5.2
  Bottom Layer w0.5: 52.3,67.3 56.666,67.3 ccw(c56.666,70.551) 58.965,68.252 v1(61.545,70.833)
NetQ5_3: Q5.3 R34.2 U5.4 | length 10.7
  Top Layer w1: R34.2 ccw(c51.85,62.838) 52.186,62.838 Q5.3 ; Q5.3@52.485,66.349 cw(c54.783,64.049) 54.783,67.3 57.508,67.3 ccw(c57.508,69.827) U5.4
NetQ6_1: pad.1@39.7,43.9 Q6.1 R26.1 R36.1 VD6.2 VU6.1 | length 11.1
  Top Layer w0.5: v1(61.545,52.833) VD6.2
  Bottom Layer w0.5: 52.3,49.3 56.666,49.3 ccw(c56.666,52.551) 58.965,50.252 v1(61.545,52.833)
NetQ6_3: Q6.3 R36.2 U6.4 | length 10.7
  Top Layer w1: R36.2 ccw(c51.85,44.838) 52.186,44.838 Q6.3 ; Q6.3@52.485,48.349 cw(c54.783,46.049) 54.783,49.3 57.508,49.3 ccw(c57.508,51.827) U6.4
NetQ7_1: pad.1@39.7,25.9 Q7.1 R27.1 R38.1 VD7.2 VU7.1 | length 11.1
  Top Layer w0.5: v1(61.545,34.833) VD7.2
  Bottom Layer w0.5: 52.3,31.3 56.666,31.3 ccw(c56.666,34.551) 58.965,32.252 v1(61.545,34.833)
NetQ7_3: Q7.3 R38.2 U7.4 | length 10.7
  Top Layer w1: R38.2 ccw(c51.85,26.838) 52.186,26.838 Q7.3 ; Q7.3@52.485,30.349 cw(c54.783,28.049) 54.783,31.3 57.508,31.3 ccw(c57.508,33.827) U7.4
NetQ8_1: pad.1@45.5,2.775 Q8.1 R28.1 R40.1 VD8.2 VU8.1 | length 44.6
  Top Layer w0.5: pad.1@45.339,2.405 VD8.2 64.805,2.405 ccw(c64.805,3.4) 65.8,3.4 65.8,3.976 ccw(c64.776,3.976) 65.5,4.7 cw(c68.221,7.759) 64.127,7.759 64.127,16.102 ccw(c61.579,16.102) 61.579,18.65 R40.1
  Top Layer w1: VU8.1@46.3,6.175 R28.1
NetQ8_3: Q8.3 R40.2 U8.4 | length 25.9
  Top Layer w0.8: Q8.3 40.238,21.163 cw(c42.017,19.385) 42.017,21.9 49.658,21.9 cw(c49.658,19.385) 51.437,21.163 53.2,19.4 R40.2 53.2,18 55.181,16.019 ccw(c57.4,18.238) 57.4,15.1 U8.4@61.795,15.1
NetR5_2: R5.2 R17.1 | length 2
  Top Layer w1: R5.2 R17.1
NetR6_2: R6.2 R18.1 | length 2
  Top Layer w1: R6.2 R18.1
NetR7_2: R7.2 R19.1 | length 2
  Top Layer w1: R7.2 R19.1
NetR8_2: R8.2 R20.1 | length 1.8
  Top Layer w1.4: R8.2 R20.1
NetR9_1: R9.1 U1.6 | length 2.6
  Top Layer w1: R9.1@20.53,64.268 ccw(c22.316,66.054) 21.662,63.614 cw(c21.008,61.173) U1.6
NetR11_1: R11.1 U2.6 | length 2.6
  Top Layer w1: R11.1@20.53,46.268 ccw(c22.316,48.054) 21.662,45.614 cw(c21.008,43.173) U2.6
NetR13_1: R13.1 U3.6 | length 2.6
  Top Layer w1: R13.1@20.53,28.268 ccw(c22.316,30.054) 21.662,27.614 cw(c21.008,25.173) U3.6
NetR15_1: R15.1 U4.6 | length 3.7
  Top Layer w0.8: R15.1 ccw(c23.024,11.6) 22.512,11.088 22.688,10.912 ccw(c24.987,13.211) 24.987,9.96 U4.6
NetR17_2: R17.2 VD1.1 | length 2
  Top Layer w0.5: R17.2 VD1.1
NetR18_2: R18.2 VD2.1 | length 2
  Top Layer w0.5: R18.2 VD2.1
NetR19_2: R19.2 VD3.1 | length 2
  Top Layer w0.5: R19.2 VD3.1
NetR20_2: R20.2 VD4.1 | length 4.9
  Top Layer w0.5: R20.2 24.724,5.575 R20.2@25.251,5.575 ; R20.2@25.17,6.13 ccw(c27.102,6.13) R20.2@25.251,5.575 ; VD4.1 27.285,3.675 cw(c27.285,4.785) 26.5,4 25.736,4.764 cw(c27.102,6.13) R20.2@25.251,5.575
NetR21_1: R21.1 U4.1 | length 3.4
  Top Layer w0.5: R21.1 34.054,9.354 ccw(c33.448,9.96) U4.1
NetR22_1: R22.1 U1.1 | length 12
  Top Layer w0.5: R22.1 29.8,65.5 ccw(c31.092,65.5) 30.178,64.587 U1.1
NetR23_1: R23.1 U2.1 | length 12
  Top Layer w0.5: R23.1 29.8,47.5 ccw(c31.092,47.5) 30.178,46.587 U2.1
NetR24_1: R24.1 U3.1 | length 12
  Top Layer w0.5: R24.1 29.8,29.5 ccw(c31.092,29.5) 30.178,28.587 U3.1
NetR29_2: R29.2 R41.1 | length 2
  Top Layer w1: R29.2 R41.1
NetR30_2: R30.2 R42.1 | length 2
  Top Layer w1: R30.2 R42.1
NetR31_2: R31.2 R43.1 | length 2
  Top Layer w1: R31.2 R43.1
NetR32_2: R32.2 R44.1 | length 1.8
  Top Layer w1.4: R32.2 R44.1
NetR33_1: R33.1 U5.6 | length 2.6
  Top Layer w1: R33.1@57.03,64.268 ccw(c58.816,66.054) 58.162,63.614 cw(c57.508,61.173) U5.6
NetR35_1: R35.1 U6.6 | length 2.6
  Top Layer w1: R35.1@57.03,46.268 ccw(c58.816,48.054) 58.162,45.614 cw(c57.508,43.173) U6.6
NetR37_1: R37.1 U7.6 | length 2.6
  Top Layer w1: R37.1@57.03,28.268 ccw(c58.816,30.054) 58.162,27.614 cw(c57.508,25.173) U7.6
NetR39_1: R39.1 U8.6 | length 3.7
  Top Layer w0.8: R39.1 ccw(c59.524,11.6) 59.012,11.088 59.188,10.912 ccw(c61.487,13.211) 61.487,9.96 U8.6
NetR41_2: R41.2 VD5.1 | length 2
  Top Layer w0.5: R41.2 VD5.1
NetR42_2: R42.2 VD6.1 | length 2
  Top Layer w0.5: R42.2 VD6.1
NetR43_2: R43.2 VD7.1 | length 2
  Top Layer w0.5: R43.2 VD7.1
NetR44_2: R44.2 VD8.1 | length 4.9
  Top Layer w0.5: R44.2 61.224,5.575 R44.2@61.751,5.575 ; R44.2@61.67,6.13 ccw(c63.602,6.13) R44.2@61.751,5.575 ; 63,4 62.236,4.764 cw(c63.602,6.13) R44.2@61.751,5.575 ; 63,4 ccw(c63.785,4.785) 63.785,3.675 VD8.1
NetR45_1: R45.1 U8.1 | length 3.4
  Top Layer w0.5: R45.1 70.554,9.354 ccw(c69.948,9.96) U8.1
NetR46_1: R46.1 U5.1 | length 12
  Top Layer w0.5: R46.1 66.3,65.5 ccw(c67.592,65.5) 66.678,64.587 U5.1
NetR47_1: R47.1 U6.1 | length 12
  Top Layer w0.5: R47.1 66.3,47.5 ccw(c67.592,47.5) 66.678,46.587 U6.1
NetR48_1: R48.1 U7.1 | length 12
  Top Layer w0.5: R48.1 66.3,29.5 ccw(c67.592,29.5) 66.678,28.587 U7.1
pads on no net: J1.4 J2.4 J3.4 J4.4 J5.4 J6.4 J7.4 J8.4 U1.3 U1.5 U2.3 U2.5 U3.3 U3.5 U4.3 U4.5 U5.3 U5.5 U6.3 U6.5 U7.3 U7.5 U8.3 U8.5

## Polygon pours and split planes (outlines as drawn)
NetQ5_1 on Top Layer "NONET_L02_P-001" (solid, remove dead copper, pour order 25): 49,59.4 49,66.9 ccw(c48.3,66.9) 48.3,67.6 47.207,67.6 ccw(c47.207,65.893) 46,67.1 cw(c44.551,68.549) 44.551,66.5 35.8,66.5 35.8,59.4
NetC5_2 on Top Layer "NONET_L02_P-001" (solid, remove dead copper, pour order 24): 35.8,77.6 35.8,70.5 44.551,70.5 cw(c44.551,68.451) 46,69.9 ccw(c47.207,71.107) 47.207,69.4 56.9,69.4 ccw(c56.9,70) 57.5,70 57.5,70.51 ccw(c55.11,70.51) 56.8,72.2 56.152,72.848 cw(c58.451,75.147) 55.2,75.147 55.2,77.6
NetQ1_1 on Top Layer "NONET_L02_P-001" (solid, remove dead copper, pour order 21): 12.5,59.4 12.5,66.9 ccw(c11.8,66.9) 11.8,67.6 10.707,67.6 ccw(c10.707,65.893) 9.5,67.1 cw(c8.051,68.549) 8.051,66.5 -0.7,66.5 -0.7,59.4
NetC1_2 on Top Layer "NONET_L02_P-001" (solid, remove dead copper, pour order 20): -0.7,77.6 -0.7,70.5 8.051,70.5 cw(c8.051,68.451) 9.5,69.9 ccw(c10.707,71.107) 10.707,69.4 20.4,69.4 ccw(c20.4,70) 21,70 21,70.51 ccw(c18.61,70.51) 20.3,72.2 19.652,72.848 cw(c21.951,75.147) 18.7,75.147 18.7,77.6
NetQ6_1 on Top Layer "NONET_L02_P-001" (solid, remove dead copper, pour order 17): 49,41.4 49,48.9 ccw(c48.3,48.9) 48.3,49.6 47.207,49.6 ccw(c47.207,47.893) 46,49.1 cw(c44.551,50.549) 44.551,48.5 35.8,48.5 35.8,41.4
NetC6_2 on Top Layer "NONET_L02_P-001" (solid, remove dead copper, pour order 16): 35.8,59.6 35.8,52.5 44.551,52.5 cw(c44.551,50.451) 46,51.9 ccw(c47.207,53.107) 47.207,51.4 56.9,51.4 ccw(c56.9,52) 57.5,52 57.5,52.51 ccw(c55.11,52.51) 56.8,54.2 56.152,54.848 cw(c58.451,57.147) 55.2,57.147 55.2,59.6
NetQ2_1 on Top Layer "NONET_L02_P-001" (solid, remove dead copper, pour order 13): 12.5,41.4 12.5,48.9 ccw(c11.8,48.9) 11.8,49.6 10.707,49.6 ccw(c10.707,47.893) 9.5,49.1 cw(c8.051,50.549) 8.051,48.5 -0.7,48.5 -0.7,41.4
NetC2_2 on Top Layer "NONET_L02_P-001" (solid, remove dead copper, pour order 12): -0.7,59.6 -0.7,52.5 8.051,52.5 cw(c8.051,50.451) 9.5,51.9 ccw(c10.707,53.107) 10.707,51.4 20.4,51.4 ccw(c20.4,52) 21,52 21,52.51 ccw(c18.61,52.51) 20.3,54.2 19.652,54.848 cw(c21.951,57.147) 18.7,57.147 18.7,59.6
NetQ7_1 on Top Layer "NONET_L02_P-001" (solid, remove dead copper, pour order 9): 49,23.4 49,30.9 ccw(c48.3,30.9) 48.3,31.6 47.207,31.6 ccw(c47.207,29.893) 46,31.1 cw(c44.551,32.549) 44.551,30.5 35.8,30.5 35.8,23.4
NetC7_2 on Top Layer "NONET_L02_P-001" (solid, remove dead copper, pour order 8): 35.8,41.6 35.8,34.5 44.551,34.5 cw(c44.551,32.451) 46,33.9 ccw(c47.207,35.107) 47.207,33.4 56.9,33.4 ccw(c56.9,34) 57.5,34 57.5,34.51 ccw(c55.11,34.51) 56.8,36.2 56.152,36.848 cw(c58.451,39.147) 55.2,39.147 55.2,41.6
NetQ8_1 on Top Layer "NONET_L02_P-001" (solid, remove dead copper, pour order 7): 35.6,10.9 40.758,10.9 cw(c40.758,8.385) 42.537,10.163 43.863,8.837 ccw(c45.642,10.615) 45.642,8.1 47.2,8.1 cw(c47.2,7.1) 48.2,7.1 48.2,0.8 cw(c47.6,0.8) 47.6,0.2 43.6,0.2 cw(c43.6,0.9) 42.9,0.9 42.9,3.758 ccw(c40.385,3.758) 42.163,5.537 41.037,6.663 ccw(c39.258,4.885) 39.258,7.4 35.6,7.4
NetC8_2 on Top Layer "NONET_L02_P-001" (solid, remove dead copper, pour order 6): 48.358,20.2 cw(c48.358,17.685) 50.137,19.463 53.363,16.237 cw(c51.585,14.458) 54.1,14.458 54.1,10.1 52.3,10.1 52.3,10.5 ccw(c49.886,10.5) 51.593,12.207 51.3,12.5 ccw(c50.334,11.534) 50.334,12.9 48.4,12.9 ccw(c48.4,11.693) 47.546,12.546 47.5,12.5 cw(c47.017,12.983) 47.017,12.3 43.424,12.3 cw(c43.424,13.324) 42.7,12.6 42.537,12.763 ccw(c40.758,10.985) 40.758,13.5 34.4,13.5 34.4,18.1 41.7,18.1 ccw(c41.7,19.3) 42.9,19.3 cw(c43.8,19.3) 43.8,20.2
NetQ4_1 on Top Layer "NONET_L02_P-001" (solid, remove dead copper, pour order 5): -0.9,10.9 4.258,10.9 cw(c4.258,8.385) 6.037,10.163 7.363,8.837 ccw(c9.142,10.615) 9.142,8.1 10.7,8.1 cw(c10.7,7.1) 11.7,7.1 11.7,0.8 cw(c11.1,0.8) 11.1,0.2 7.1,0.2 cw(c7.1,0.9) 6.4,0.9 6.4,3.758 ccw(c3.885,3.758) 5.663,5.537 4.537,6.663 ccw(c2.758,4.885) 2.758,7.4 -0.9,7.4
NetC4_2 on Top Layer "NONET_L02_P-001" (solid, remove dead copper, pour order 4): 11.858,20.2 cw(c11.858,17.685) 13.637,19.463 16.863,16.237 cw(c15.085,14.458) 17.6,14.458 17.6,10.1 15.8,10.1 15.8,10.5 ccw(c13.386,10.5) 15.093,12.207 14.8,12.5 ccw(c13.834,11.534) 13.834,12.9 11.9,12.9 ccw(c11.9,11.693) 11.046,12.546 11,12.5 cw(c10.517,12.983) 10.517,12.3 6.924,12.3 cw(c6.924,13.324) 6.2,12.6 6.037,12.763 ccw(c4.258,10.985) 4.258,13.5 -2.1,13.5 -2.1,18.1 5.2,18.1 ccw(c5.2,19.3) 6.4,19.3 cw(c7.3,19.3) 7.3,20.2
NetQ3_1 on Top Layer "NONET_L02_P-001" (solid, remove dead copper, pour order 1): 12.5,23.4 12.5,30.9 ccw(c11.8,30.9) 11.8,31.6 10.707,31.6 ccw(c10.707,29.893) 9.5,31.1 cw(c8.051,32.549) 8.051,30.5 -0.7,30.5 -0.7,23.4
NetC3_2 on Top Layer "NONET_L02_P-001" (solid, remove dead copper, pour order 0): -0.7,41.6 -0.7,34.5 8.051,34.5 cw(c8.051,32.451) 9.5,33.9 ccw(c10.707,35.107) 10.707,33.4 20.4,33.4 ccw(c20.4,34) 21,34 21,34.51 ccw(c18.61,34.51) 20.3,36.2 19.652,36.848 cw(c21.951,39.147) 18.7,39.147 18.7,41.6
NetQ5_1 on Bottom Layer "NONET_L02_P-001" (solid, remove dead copper, pour order 27): 53.1,67.6 cw(c53.1,66.8) 53.9,66.8 53.9,59.4 45.5,59.4 35.8,59.4 35.8,66.5 44.551,66.5 ccw(c44.551,68.549) 46,67.1 cw(c47.207,65.893) 47.207,67.6
NetC5_2 on Bottom Layer "NONET_L02_P-001" (solid, remove dead copper, pour order 26): 53.1,69.4 ccw(c53.1,70.2) 53.9,70.2 53.9,77.6 45.5,77.6 35.8,77.6 35.8,70.5 44.551,70.5 cw(c44.551,68.451) 46,69.9 ccw(c47.207,71.107) 47.207,69.4
NetQ1_1 on Bottom Layer "NONET_L02_P-001" (solid, remove dead copper, pour order 23): 16.6,67.6 cw(c16.6,66.8) 17.4,66.8 17.4,59.4 9,59.4 -0.7,59.4 -0.7,66.5 8.051,66.5 ccw(c8.051,68.549) 9.5,67.1 cw(c10.707,65.893) 10.707,67.6
NetC1_2 on Bottom Layer "NONET_L02_P-001" (solid, remove dead copper, pour order 22): 16.6,69.4 ccw(c16.6,70.2) 17.4,70.2 17.4,77.6 9,77.6 -0.7,77.6 -0.7,70.5 8.051,70.5 cw(c8.051,68.451) 9.5,69.9 ccw(c10.707,71.107) 10.707,69.4
NetQ6_1 on Bottom Layer "NONET_L02_P-001" (solid, remove dead copper, pour order 19): 53.1,49.6 cw(c53.1,48.8) 53.9,48.8 53.9,41.4 45.5,41.4 35.8,41.4 35.8,48.5 44.551,48.5 ccw(c44.551,50.549) 46,49.1 cw(c47.207,47.893) 47.207,49.6
NetC6_2 on Bottom Layer "NONET_L02_P-001" (solid, remove dead copper, pour order 18): 53.1,51.4 ccw(c53.1,52.2) 53.9,52.2 53.9,59.6 45.5,59.6 35.8,59.6 35.8,52.5 44.551,52.5 cw(c44.551,50.451) 46,51.9 ccw(c47.207,53.107) 47.207,51.4
NetQ2_1 on Bottom Layer "NONET_L02_P-001" (solid, remove dead copper, pour order 15): 16.6,49.6 cw(c16.6,48.8) 17.4,48.8 17.4,41.4 9,41.4 -0.7,41.4 -0.7,48.5 8.051,48.5 ccw(c8.051,50.549) 9.5,49.1 cw(c10.707,47.893) 10.707,49.6
NetC2_2 on Bottom Layer "NONET_L02_P-001" (solid, remove dead copper, pour order 14): 16.6,51.4 ccw(c16.6,52.2) 17.4,52.2 17.4,59.6 9,59.6 -0.7,59.6 -0.7,52.5 8.051,52.5 cw(c8.051,50.451) 9.5,51.9 ccw(c10.707,53.107) 10.707,51.4
NetQ7_1 on Bottom Layer "NONET_L02_P-001" (solid, remove dead copper, pour order 11): 53.1,31.6 cw(c53.1,30.8) 53.9,30.8 53.9,23.4 45.5,23.4 35.8,23.4 35.8,30.5 44.551,30.5 ccw(c44.551,32.549) 46,31.1 cw(c47.207,29.893) 47.207,31.6
NetC7_2 on Bottom Layer "NONET_L02_P-001" (solid, remove dead copper, pour order 10): 53.1,33.4 ccw(c53.1,34.2) 53.9,34.2 53.9,41.6 45.5,41.6 35.8,41.6 35.8,34.5 44.551,34.5 cw(c44.551,32.451) 46,33.9 ccw(c47.207,35.107) 47.207,33.4
NetQ3_1 on Bottom Layer "NONET_L02_P-001" (solid, remove dead copper, pour order 3): 16.6,31.6 cw(c16.6,30.8) 17.4,30.8 17.4,23.4 9,23.4 -0.7,23.4 -0.7,30.5 8.051,30.5 ccw(c8.051,32.549) 9.5,31.1 cw(c10.707,29.893) 10.707,31.6
NetC3_2 on Bottom Layer "NONET_L02_P-001" (solid, remove dead copper, pour order 2): 16.6,33.4 ccw(c16.6,34.2) 17.4,34.2 17.4,41.6 9,41.6 -0.7,41.6 -0.7,34.5 8.051,34.5 cw(c8.051,32.451) 9.5,33.9 ccw(c10.707,35.107) 10.707,33.4

## Keep-outs
Keep-Out Layer:
  the board outline again, w0

## Other copper
Top Layer:
  region net NetJ5_1: 68.4,74.1 67.783,74.1 ccw(c67.783,73.417) 67.3,73.9 67.025,73.625 ccw(c67.412,73.238) 66.865,73.238 ccw(c67.567,73.238) 67.07,72.741 67.349,72.462 ccw(c67.603,72.716) 67.603,72.357 68.436,72.357
  region net NetJ1_1: 31.9,74.1 31.283,74.1 ccw(c31.283,73.417) 30.8,73.9 30.525,73.625 ccw(c30.912,73.238) 30.365,73.238 ccw(c31.067,73.238) 30.57,72.741 30.849,72.462 ccw(c31.103,72.716) 31.103,72.357 31.936,72.357
  region net NetJ6_1: 68.4,56.1 67.783,56.1 ccw(c67.783,55.417) 67.3,55.9 67.025,55.625 ccw(c67.412,55.238) 66.865,55.238 ccw(c67.567,55.238) 67.07,54.741 67.349,54.462 ccw(c67.603,54.716) 67.603,54.357 68.436,54.357
  region net NetJ2_1: 31.9,56.1 31.283,56.1 ccw(c31.283,55.417) 30.8,55.9 30.525,55.625 ccw(c30.912,55.238) 30.365,55.238 ccw(c31.067,55.238) 30.57,54.741 30.849,54.462 ccw(c31.103,54.716) 31.103,54.357 31.936,54.357
  region net NetJ7_1: 68.4,38.1 67.783,38.1 ccw(c67.783,37.417) 67.3,37.9 67.025,37.625 ccw(c67.412,37.238) 66.865,37.238 ccw(c67.567,37.238) 67.07,36.741 67.349,36.462 ccw(c67.603,36.716) 67.603,36.357 68.436,36.357
  region net NetJ8_1: 70.9,5.14 70.283,5.14 ccw(c70.283,4.457) 69.8,4.94 69.525,4.665 ccw(c69.912,4.278) 69.365,4.278 ccw(c70.067,4.278) 69.57,3.781 69.849,3.502 ccw(c70.103,3.756) 70.103,3.397 70.936,3.397
  region net NetJ4_1: 34.4,5.14 33.783,5.14 ccw(c33.783,4.457) 33.3,4.94 33.025,4.665 ccw(c33.412,4.278) 32.865,4.278 ccw(c33.567,4.278) 33.07,3.781 33.349,3.502 ccw(c33.603,3.756) 33.603,3.397 34.436,3.397
  region net NetJ3_1: 31.9,38.1 31.283,38.1 ccw(c31.283,37.417) 30.8,37.9 30.525,37.625 ccw(c30.912,37.238) 30.365,37.238 ccw(c31.067,37.238) 30.57,36.741 30.849,36.462 ccw(c31.103,36.716) 31.103,36.357 31.936,36.357

## Silkscreen, mask and mechanical layers (free items; w line width, h text height)
Top Overlay:
  lines w1: 0.5,23.5 36,23.5 ; 0.5,41.5 36,41.5 ; 0.5,59.5 36,59.5 ; 33.5,23.5 33.5,41.5 33.5,59.5 33.5,76.5 ; 36,0.5 36,23.5 ; 36,76.5 36,59.5 ; 70,23.5 70,41.5 70,59.5 70,76.5 ; 71.5,23.5 36,23.5 ; 71.5,41.5 36,41.5 ; 71.5,59.5 36,59.5 ; 36,23.5 36,41.5 ; 36,41.5 36,59.5
Bottom Overlay:
  lines w1: 0.5,23.5 36,23.5 ; 0.5,41.5 36,41.5 ; 0.5,59.5 36,59.5 ; 33.5,23.5 33.5,41.5 33.5,59.5 33.5,76.5 ; 36,0.5 36,23.5 ; 36,76.5 36,59.5 ; 70,23.5 70,41.5 70,59.5 70,76.5 ; 71.5,23.5 36,23.5 ; 71.5,41.5 36,41.5 ; 71.5,59.5 36,59.5 ; 36,23.5 36,41.5 ; 36,41.5 36,59.5